# Altium PCB w32_dmx512-master_PCB.PcbDoc
Units mil, origin at the board's own origin, x right, y up, seen from the top; angles counter-clockwise.
Board outline 4660.03 x 1760.03 mil, 2 copper layers (Top Layer, Bottom Layer); 37 components, 31 nets, 143 pads, 16 vias.
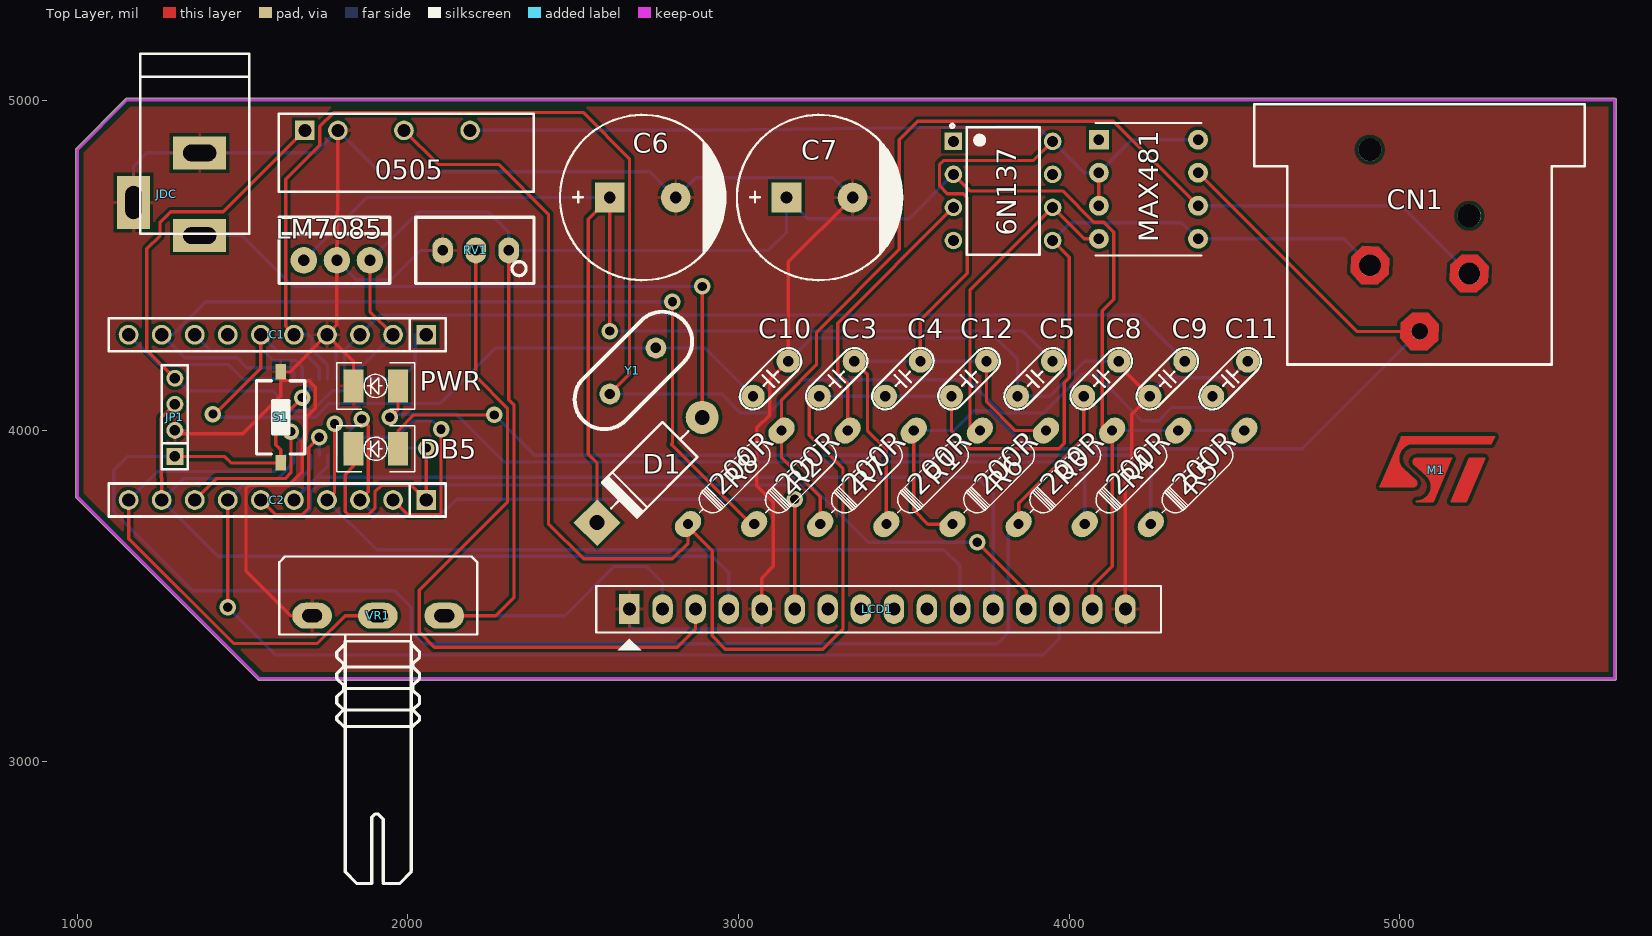
[diagram p0: Top Layer view]
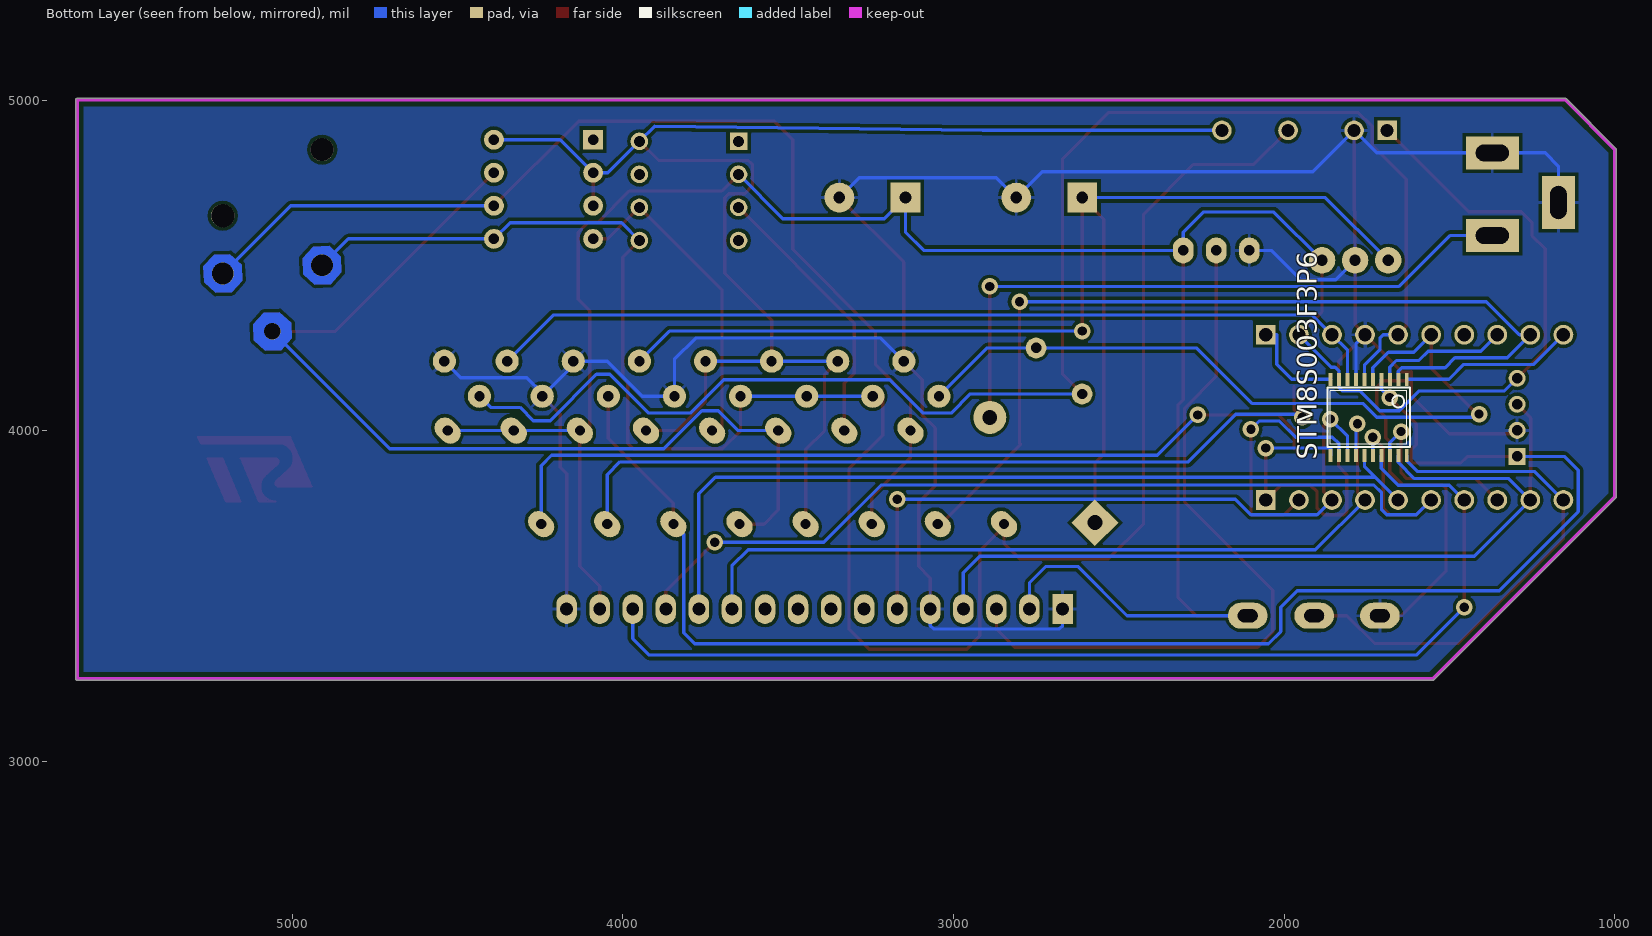
[diagram p1: Bottom Layer view, seen from below]
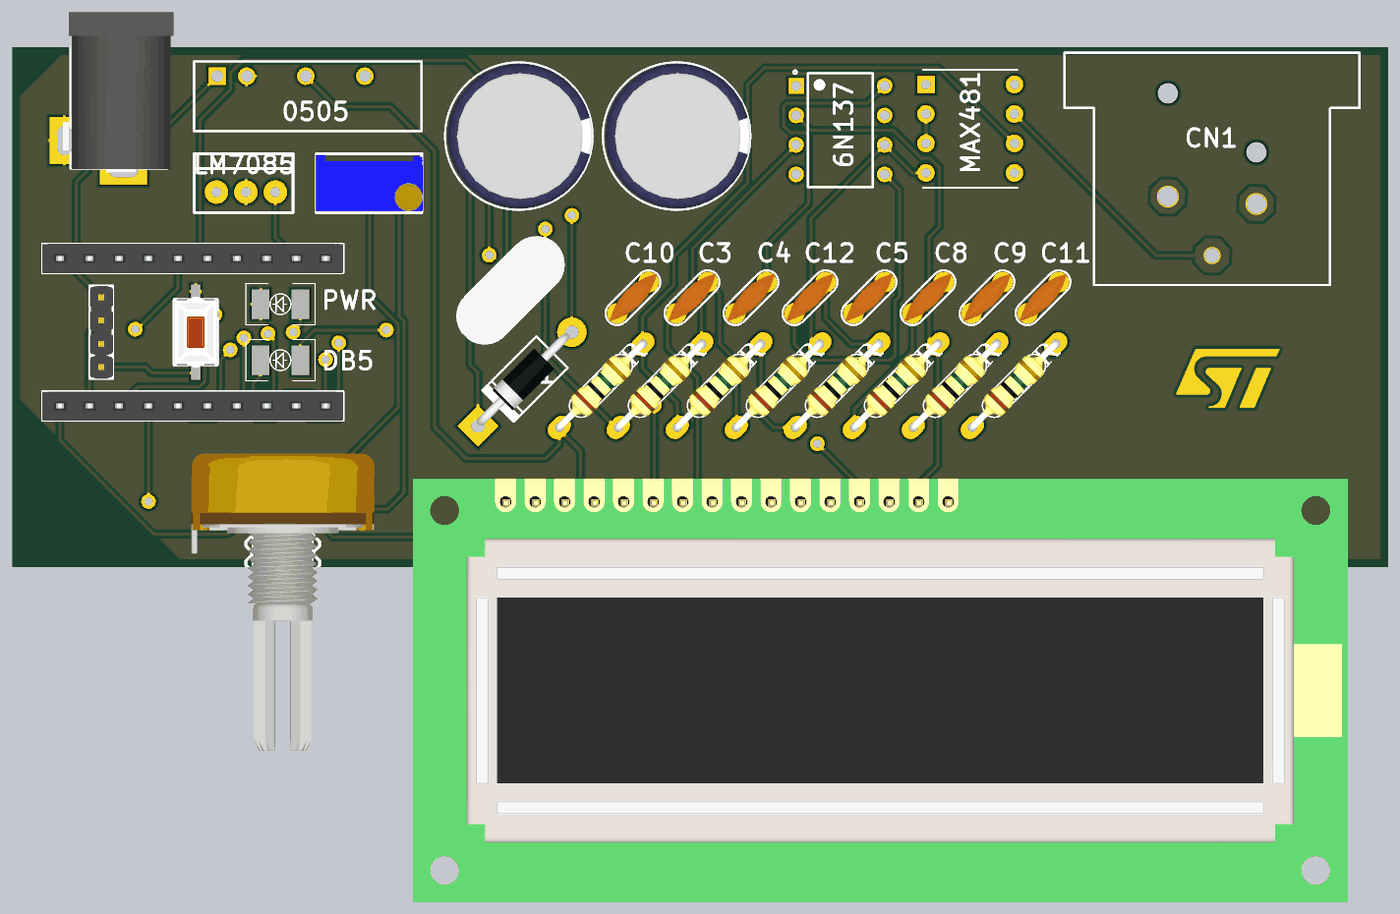
[diagram p2: 3D render of the assembled board from above, using the file's embedded part models]

## Layer stack, top to bottom
Top Solder: solder mask 0.4, Solder Resist, Dk 3.5
Top Layer: signal copper 1.4
Dielectric 1: dielectric 12.6, FR-4, Dk 4.8
Bottom Layer: signal copper 1.4
Bottom Solder: solder mask 0.4, Solder Resist, Dk 3.5

## Board outline
994.99,3800 994.99,4850 cw(c1000,4850) 996.47,4853.56 996.45,4853.55 1146.45,5003.55 1146.44,5003.53 cw(c1150,5000) 1150,5005.02 5650,5005.02 cw(c5650,5000) 5655.02,5000 5655.02,3250 cw(c5650,3250) 5650,3244.99 1550,3244.99 cw(c1550,3250) 1546.44,3246.47 1546.45,3246.45 996.45,3796.45 996.47,3796.44 cw(c1000,3800)

## Design rules (kind name [scope] priority, off if disabled: settings)
Clearance [All] p1: gap=10
PolygonConnect [All] p1: connectstyle=Relief reliefconductorwidth=10 reliefentries=4 polygonreliefangle="90 Angle" airgapwidth=10
RoutingVias [All] p1: holewidth=28 width=50 viastyle="Through Hole" minholewidth=28 minwidth=50 maxholewidth=28 maxwidth=50
SolderMaskExpansion [All] p1: expansion=4
Width [All] p1: maxlimit=10 minlimit=10 preferedwidth=10
30 further rules are at their usual default settings.

## Components (designator, comment, footprint, x,y, rotation, side; value= is the part's Value field where it differs from the comment)
6N137 "6N137" DIP762W50P254L977H451Q8 3800,4725 r0 top
0505 "REE-0505S" SIP600W25P254L1960H1020Q4P 1995,4840 r0 top (schematic designator U?)
C1 "JP10" JP10-C1T 2055,4290 r180 top
C2 "JP10" JP10-C1T 2055,3790 r180 top
C3 "104" CN150 3296.97,4156.97 r45 top
C4 "104" CN150 3496.97,4156.97 r45 top
C5 "104" CN150 3896.97,4156.97 r45 top
C6 "Cap Pol3" CP2/5 2610,4705 r0 top
C7 "Cap Pol3" CP2/5 3145,4705 r0 top
C8 "104" CN150 4096.97,4156.97 r45 top
C9 "104" CN150 4296.97,4156.97 r45 top
C10 "104" CN150 3096.97,4156.97 r45 top
C11 "104" CN150 4486.97,4156.97 r45 top
C12 "104" CN150 3696.97,4156.97 r45 top
CN1 "NC3FBH1" NC3FBH1 5060,4500 r0 top
D1 "1N4007" D2A 2571.8,3721.8 r45 top
DB5 "LED" LED-RED-0805 1970,3945 r180 top (schematic designator LED2)
JDC "Jac DC" DC-IN 1270,4715 r270 top
JP1 "JP4x1-2.0" J4-D1T 1295,4040 r90 top
LCD1 "LCD 16x2A" LCD16X2N 2670,3460 r0 top
LM7085 "LM7805" 7805 1785,4515 r0 top (schematic designator IC1)
M1 "STLOGO" STLOGO-SILVER 5110,3880 r0 top
MAX481 "MAX481CPA" 21-0043D_8 4390,4580 r0 top
PWR "LED" LED-RED-0805 1970,4135 r180 top (schematic designator LED1)
R1 "R0.4W" "DIEN TRO 1/4 W" 3447.16,3717.16 r45 top
R2 "R0.4W" "DIEN TRO 1/4 W" 3047.16,3717.16 r45 top
R3 "R0.4W" "DIEN TRO 1/4 W" 3847.16,3717.16 r45 top
R4 "R0.4W" "DIEN TRO 1/4 W" 4047.16,3717.16 r45 top
R5 "R0.4W" "DIEN TRO 1/4 W" 4247.16,3717.16 r45 top
R6 "R0.4W" "DIEN TRO 1/4 W" 3647.16,3717.16 r45 top
R7 "R0.4W" "DIEN TRO 1/4 W" 3247.16,3717.16 r45 top
R8 "R0.4W" "DIEN TRO 1/4 W" 2847.16,3717.16 r45 top
RV1 "RV20K" RVAR10K 2205,4545 r180 top
S1 "SW-SMD" SW-SMD 1615,4040 r90 top
STM8S003F3P6 "STM8S003F3P6" TSSOP20 1743.98,4040.13 r0 bottom
VR1 "10k" VR-S1 1910,3440 r0 top
Y1 "8MHz" XTAL 2681.86,4181.82 r45 top

## Footprints (in the part's own frame and the unit in brackets; to place one, negate y for a bottom-side part, rotate by r counter-clockwise, add the part's x,y. Pads: shape width x height; smd on the part's side, far side on the other; paste and mask are expansions set on the pad)
21-0043D_8 [mil]
  rect 60x60 hole 32: 1(-300,300)
  round 60 hole 32: 2(-300,200) 3(-300,100) 4(-300,0) 5(0,0) 6(0,100) 7(0,200) 8(0,300)
  silkscreen extent -310,-50 10,350
7805 [mil]
  round 80 hole 34: 1(-100,0) 2(0,0) 3(100,0)
  silkscreen extent -175,-70 160,130
CN150 [mil]
  round 70 hole 31: 1(-75,0) 2(75,0)
  silkscreen extent -115,-40 115,40, body extent -115,-33 115,33, height 235
CP2/5 [mil] "Tu hoa 1000uF/25V,50V"
  rect 90x90 hole 35: 1(0,0)
  round 90 hole 35: 2(200,0)
  silkscreen extent -150,-250 350,250, body extent -142,-246 350,246, height 984
D2A [mil] "Diode 2A, W 150mil, L 450mil"
  round 100 hole 45: 1(450,0)
  rect 100x100 hole 45: 2(0,0)
  silkscreen extent 61,-75 391,75, body extent 5,-47 435,54, height 100
DC-IN [mil] "Jac DC input"
  rect 100x160 hole 50 slot 100 at 90 deg: 1(125,100) 2(-125,100)
  rect 160x100 hole 50 slot 100 at 0 deg: 3(25,-100)
  silkscreen extent -425,-80 120,250, body extent -410,-105 134,269, height 434
"DIEN TRO 1/4 W" [mm]
  oval 2.2x1.6 hole 0.787: 1(0,0) 2(10.16,0)
  silkscreen extent 1.26,-1.02 8.88,1.02, body extent -0.3,-1.16 10.46,1.16, height 2.93
DIP762W50P254L977H451Q8 [mm]
  rect 1.35x1.35 hole 0.85: 1(-3.81,3.81)
  round 1.35 hole 0.85: 2(-3.81,1.27) 3(-3.81,-1.27) 4(-3.81,-3.81) 5(3.81,-3.81) 6(3.81,-1.27) 7(3.81,1.27) 8(3.81,3.81)
  silkscreen extent -4.04,-4.9 2.8,5.14
J4-D1T [mm] "4 pins, 1 row, straight, gold plating"
  rect 1.3x1.3 hole 0.8: 1(-3,0)
  round 1.3 hole 0.8: 2(-1,0) 3(1,0) 4(3,0)
  silkscreen extent -4,-1 4,1, body extent -4,-1 4,1, height 6.01
JP10-C1T [mm] "10 row, straight, gold plating"
  rect 1.52x1.52 hole 1.02: 1(0,0)
  round 1.52 hole 1.02: 2(2.54,0) 3(5.08,0) 4(7.62,0) 5(10.16,0) 6(12.7,0) 7(15.24,0) 8(17.78,0) 9(20.32,0) 10(22.86,0)
  silkscreen extent -1.52,-1.27 24.38,1.27, body extent -1.52,-1.25 24.38,1.25, height 8.51
LCD16X2N [mil] "LCD dipslay 16x2, 16 pin"
  rect 62x90 hole 39: 1(0,0)
  oval 62x90 hole 39: 2(100,0) 3(200,0) 4(300,0) 5(400,0) 6(500,0) 7(600,0) 8(700,0) 9(800,0) 10(900,0) 11(1000,0) 12(1100,0) 13(1200,0) 14(1300,0) 15(1400,0) 16(1500,0)
  silkscreen extent -100,-125 1608,70, body extent -320,-1353 2850,84, height 764
LED-RED-0805 [mil]
  rect 60x100 smd: 1(0,0) 2(135,0)
  silkscreen extent -50,-70 185,70, body extent -20,-60 154,60, height 75
NC3FBH1 [mil]
  round 66 hole 66: 1(-150,0) 2(150,-25)
  round 50 hole 50: 3(0,-200)
  round 70 hole 70 unplated: None(-150,350) None(150,150)
  Top Layer region: -91.27,21.38 -123.59,56.64 -171.38,58.73 -206.64,26.41 -208.73,-21.38 -176.41,-56.64 -128.62,-58.73 -93.36,-26.41
  Top Layer region: 58.73,-178.62 26.41,-143.36 -21.38,-141.27 -56.64,-173.59 -58.73,-221.38 -26.41,-256.64 21.38,-258.73 56.64,-226.41
  Top Layer region: 208.73,-3.62 176.41,31.64 128.62,33.73 93.36,1.41 91.27,-46.38 123.59,-81.64 171.38,-83.73 206.64,-51.41
  Bottom Layer region: -91.27,21.38 -123.59,56.64 -171.38,58.73 -206.64,26.41 -208.73,-21.38 -176.41,-56.64 -128.62,-58.73 -93.36,-26.41
  Bottom Layer region: 58.73,-178.62 26.41,-143.36 -21.38,-141.27 -56.64,-173.59 -58.73,-221.38 -26.41,-256.64 21.38,-258.73 56.64,-226.41
  Bottom Layer region: 208.73,-3.62 176.41,31.64 128.62,33.73 93.36,1.41 91.27,-46.38 123.59,-81.64 171.38,-83.73 206.64,-51.41
  Multi-Layer region: -91.27,21.38 -123.59,56.64 -171.38,58.73 -206.64,26.41 -208.73,-21.38 -176.41,-56.64 -128.62,-58.73 -93.36,-26.41
  Multi-Layer region: 58.73,-178.62 26.41,-143.36 -21.38,-141.27 -56.64,-173.59 -58.73,-221.38 -26.41,-256.64 21.38,-258.73 56.64,-226.41
  Multi-Layer region: 208.73,-3.62 176.41,31.64 128.62,33.73 93.36,1.41 91.27,-46.38 123.59,-81.64 171.38,-83.73 206.64,-51.41
  silkscreen extent -500,-300 500,488
RVAR10K [mm] "Bien tro vi chinh"
  oval 1.6x2 hole 0.8: 1(-2.54,0) 2(0,0) 3(2.54,0)
  silkscreen extent -4.47,-2.54 4.6,2.54, body extent -4.54,-2.4 4.66,2.4, height 12.02
SIP600W25P254L1960H1020Q4P [mm]
  rect 1.508x1.508 hole 1: 1(-7.8,1.73)
  round 1.508 hole 1: 2(-5.26,1.73) 4(-0.18,1.73) 6(4.9,1.73)
  silkscreen extent -9.8,-3 9.8,3
STLOGO-SILVER [mil]
  Top Layer lines w6: -149,-49 -169,-49 ; -34,-89 -9,-89 -9,-84 -29,-84 -24,-79 -4,-79 -4,-74 -19,-74 -14,-69 1,-69 1,-64 -14,-64 -9,-59 6,-59 6,-54 -9,-54 -9,-49 6,-49 ; 51,-94 106,36 86,-94 141,36 81,-94 ; 166,86 -109,86 -104,91 171,91 171,96 -104,96 -164,-49 -104,86 -159,-49 -99,86 -104,71 -94,86 -74,81 -94,81 -94,76 -99,71 -114,56 -119,31 -154,-49 -64,-44 -149,-44 ; -169,-49 -104,101 176,101 166,81 -69,81 ccw(c-69,36) -100.82,4.18 -62.31,-31.57 cw(c-69,-39) -69,-49 -169,-49 ; -149,-44 -119,26 -114,26 -119,21 -114,21 -124,16 -114,16 -124,11 -109,11 -129,6 -104,6 -129,1 -99,1 -134,-4 -94,-4 -134,-9 -89,-9 -139,-14 -84,-14 -139,-19 -79,-19 -139,-24 -74,-24 -144,-29 -69,-29 -144,-34 -64,-34 -144,-39 -64,-39 -149,-44 ; -59,16 -9,-29 -14,-39 -9,-64 16,-29 ; -59,16 -19,-19 ; -59,16 -64,21 36,21 41,26 -69,26 -64,31 41,31 -54,16 -19,-19 ; -59,16 36,16 31,11 -49,11 -49,6 31,6 31,1 -39,1 -39,-4 26,-4 26,-9 -29,-9 -29,-14 21,-14 21,-19 -19,-19 ; -19,-19 -19,-24 16,-24 16,-29 ; 6,-49 16,-29 ; 6,-49 6,-44 -9,-44 -9,-39 11,-39 11,-34 -14,-34 -14,-29 16,-29 ; 81,-94 131,36 76,-94 126,36 71,-94 121,36 66,-94 116,36 61,-94 111,36 56,-94 101,36 ; 81,-94 136,36 91,-94 ; 91,-94 146,36 101,36 ; 91,-94 46,-94 101,36 ; -65.69,18.57 cw(c-59,26) -59,36 46,36 -9,-94 -59,-94 ccw(c-59,-49) -27.18,-17.18 -65.69,18.57
SW-SMD [mm] "Switch SMD type"
  rect 1.2x0.8 smd: 1(-3.5,0) 2(3.5,0)
  silkscreen extent -2.82,-1.85 2.82,1.85, body extent -3.05,-1.85 3.05,1.85, height 2.5
TSSOP20 [mil]
  rect 12x39 smd: 1(-115.16,-114.87) 2(-89.57,-114.87) 3(-63.98,-114.87) 4(-38.39,-114.87) 5(-12.79,-114.87) 6(12.8,-114.87) 7(38.39,-114.87) 8(63.98,-114.87) 9(89.57,-114.87) 10(115.16,-114.87) 11(115.16,114.87) 12(89.57,114.87) 13(63.98,114.87) 14(38.39,114.87) 15(12.8,114.87) 16(-12.79,114.87) 17(-38.39,114.87) 18(-63.98,114.87) 19(-89.57,114.87) 20(-115.16,114.87)
  silkscreen extent -125,-90 125,90
VR-S1 [mil]
  oval 120x78.74 hole 40 slot 60 at 0 deg: 1(-200,0) 2(-1,0) 3(200,0)
  silkscreen extent -299,-810 300,179, body extent -310,-818 310,188, height 839
XTAL [mm]
  round 1.6 hole 0.8: 1(-2.552,0.001) 2(2.448,0.001)
  silkscreen extent -5.44,-2.29 5.44,2.29, body extent -5.55,-2.32 5.62,2.35, height 3.63

## Part data
6N137: "High CMR, High Speed TTL Compatible Optocouplers"
0505: "REE Series 4.5 - 5.5 V 1 W Single Output Through Hole DC/DC-Converter - SIP7"
C1 C2: "WR-PHD 2.54 mm Angled Socket Header"
C3 C4 C5 C8 C9 C10 C11 C12: library part CN1.5, "Capacitor Ceramic"
C6 C7: "Polarized Capacitor (Surface Mount)"
CN1: "XLR Receptacle; Female; Gold; Horizontal PCB Mount; 0.996 in.; Ground"
D1: library part D1A, "Diode 1A"
DB5 PWR: library part "LED SMD"
JDC: library part DCIN, "Jac DC input"
JP1: "WR-PHD 2.00 mm Socket Header"
LCD1: library part LCD16x2A, "LCD dipslay 16 char, 2 line"
MAX481: "Single Transmitter/Receiver RS-422/RS-485 8-Pin PDIP N"
R1 R2 R3 R4 R5 R6 R7 R8: library part "Res 1/4 W", "Resistor"
RV1: library part "Variable Resistor", "Variable Resistor"
S1: "Switch"
STM8S003F3P6: "Mainstream Value line 8-bit MCU with 8 Kbytes Flash, 16 MHz CPU, integrated EEPROM"
VR1: library part VR-S, "Var Resistor"
Y1: library part XTAL, "Crystal Oscillator"

## Via types
v1: diameter 50, hole 28, Top Layer to Bottom Layer, 16 vias

## Nets (pads, with @x,y where several pads share a name; then routed paths per layer and width w, separated by ;. In a path a pad name is that pad's centre, name@x,y a point inside that pad or via, vN(x,y) a via of type N, cw(c..) or ccw(c..) an arc to the next point about the centre after c; other vN are vias at no path point)
+5V: 6N137.2 0505.1 C1.2 C7.1 JP1.4 LCD1.2 LCD1.15 LM7085.3 R3.2 R4.2 R5.2 RV1.1 STM8S003F3P6.9 VR1.3 | length 8553.6
  Top Layer w10: JP1.4 1210,4243.11 1210,4550 1250,4590 1250,4630 1282,4662 1441.8,4662 0505.1 ; LM7085.3 1885,4360 C1.2 ; VR1.3 2265,3440 2320.8,3495.8 2320.8,4077.2 2305,4093 RV1.1 ; 6N137.2 3700,4725 3980,4725 4075,4630 4105,4630 4135,4600 4135,4397 4100,4362 4100,3995.82 R3.2@4130,3995.82 ; LCD1.15 4070,3529 4130,3589 R3.2@4130,3995.82 ; R3.2 R3.2@4130,3995.82
  Bottom Layer w10: JP1.4 1333.11,4120 1591,4120 1651,4060 1711,4060 1771.43,4120.43 1823.97,4120.43 1833.54,4130 STM8S003F3P6.9 1833.54,4180 1845.54,4192 1857,4192 C1.2 ; LM7085.3 2031,4661 2244,4661 2305,4600 RV1.1 3090,4545 3145,4600 C7.1 3209,4641 3516,4641 6N137.2 ; VR1.3 2475,3440 2624,3589 2720,3589 2770,3539 LCD1.2 ; R3.2 R4.2 R5.2
ADC_IN4: C2.10 STM8S003F3P6.20 VR1.2 | length 1576.1
  Top Layer w10: C2.10 1155,3673.29 1472.29,3356 1726,3356 1810,3440 VR1.2
  Bottom Layer w10: C2.10 1241,3876 1595.42,3876 1628.82,3909.4 STM8S003F3P6.20
GISOL: 6N137.5 0505.4 C3.1 C4.1 C12.1 CN1.1 MAX481.5 R8.1 | length 6146.9
  Top Layer w10: 0505.4 2091.02,4805 2274,4805 2425,4654 2425,3718 2531,3612 2800,3612 2847.16,3659.16 R8.1@2847.16,3708.81 ; R8.1 R8.1@2847.16,3708.81 ; C3.1 3214,4103.93 3214,3986 3316,3884 3316,3400 3255,3339 2960,3339 2920,3379 2920,3635.96 R8.1@2847.16,3708.81 ; C12.1 3643.93,4000 3698.93,3945 3968.85,3945 3984.85,3961 3984.85,4144.85 4000,4160 4000,4525 6N137.5
  Bottom Layer w10: C3.1 C4.1 C12.1 ; 6N137.5 4004,4629 4341,4629 MAX481.5 4830,4580 CN1.1
GND: 0505.2 C1.4 C5.1 C6.2 C7.2 C8.2 C9.1 C10.2 C11.2 JDC.2 JDC.3 JP1.2 LCD1.1 LCD1.5 LCD1.16 LM7085.2 PWR.2 RV1.3 S1.2 STM8S003F3P6.7 VR1.1 | length 9946.9
  Top Layer w10: JP1.2 1305.63,3990 1500,3990 1615,4105 1615,4151 ; S1.2 S1.2@1615,4177 ; VR1.1 1646,3440 1510,3576 1510,3824.92 1520,3834.92 1640,3834.92 1680,3874.92 1680,3966 1692,3978 1692,4040 1720,4068 1720,4131 1700,4151 1615,4151 ; 0505.2 1787.91,4713.91 LM7085.2 1785,4320 C1.4 ; PWR.2 1835,4210 C1.4 ; LCD1.5 3070,3554 3105,3589 3105,3783 3055,3833 3055,4008 3094,4047 3094,4154 C10.2 3150,4510 C7.2 ; C8.2 4150,4197.87 C9.1 4189,4049 4189,3889 4170,3870 LCD1.16 ; 1615,4151 S1.2@1615,4177 ; S1.2@1615,4177 1642,4177 C1.4
  Bottom Layer w10: JDC.3 1170,4800 1210,4840 JDC.2 1719.8,4840 0505.2 1913.02,4783 2732,4783 C6.2 2870,4765 3285,4765 C7.2 ; C1.4 1782.36,4262.64 STM8S003F3P6.7 ; LM7085.2 1844,4456 1950,4456 2039,4545 RV1.3 ; LCD1.1 2670,3410 2680,3400 3060,3400 3070,3410 LCD1.5 ; C10.2 3220,4280 3780,4280 3843.93,4216.07 C5.1 3940.87,4103.93 4046.93,4210 4137.87,4210 C9.1 4243.93,4113.93 4290,4160 4490,4160 C11.2
LCD_DB4: C2.4 LCD1.11 STM8S003F3P6.14 | length 2465.4
  Top Layer w10: C2.4 1778,3813 v1(1778,4020.43)
  Bottom Layer w10: C2.4 1905,3640 3621,3640 3670,3591 LCD1.11 ; v1(1778,4020.43) 1782.36,4016.06 STM8S003F3P6.14
LCD_DB5: C2.5 LCD1.12 STM8S003F3P6.15 | length 2593.1
  Bottom Layer w10: C2.5 1724,3859 ; STM8S003F3P6.15 1756.77,3891.77 1724,3859 ; LCD1.12 3770,3809 3720,3859 1724,3859
LCD_DB6: C2.6 LCD1.13 STM8S003F3P6.16 | length 3043.8
  Top Layer w10: C2.6 1600,3745 1680,3745 1700,3765 1700,3948 v1(1732,3980) ; v1(3722,3662) 3870,3514 LCD1.13
  Bottom Layer w10: C2.6 1600,3745 1690,3745 1705,3760 1705,3811.71 1728.71,3835.43 3218.57,3835.43 3392,3662 v1(3722,3662) ; STM8S003F3P6.16 1731.18,3979.18 v1(1732,3980)
LCD_DB7: C2.7 LCD1.14 STM8S003F3P6.17 | length 3338.4
  Top Layer w10: v1(1455,3466) C2.7
  Bottom Layer w10: v1(1455,3466) 1600,3321 3920,3321 3970,3371 LCD1.14 ; C2.7 1499.92,3834.92 1654.51,3834.92 1705.59,3886 STM8S003F3P6.17
LCD_EN: C2.3 LCD1.6 STM8S003F3P6.13 | length 2080.1
  Top Layer w10: C2.3 1880,3815 1880,4015 v1(1860,4035) ; LCD1.6 v1(3170,3792)
  Bottom Layer w10: STM8S003F3P6.13 1807.95,3982.95 v1(1860,4035) ; C2.3 1900,3745 2100,3745 2147,3792 v1(3170,3792)
LCD_RS: C2.9 JP1.3 LCD1.4 STM8S003F3P6.19 | length 2690.8
  Top Layer w10: C2.9 1255,3857 1254,3858 1254,4038.37 JP1.3
  Bottom Layer w10: STM8S003F3P6.19 1654.41,3903.91 1605.42,3854.92 1319.92,3854.92 C2.9 1425,3620 2920,3620 2970,3570 LCD1.4
Net6N137_3: 6N137.3 R2.2 | length 832.4
  Top Layer w10: R2.2 3330,4143 3300,4173 3300,4325 6N137.3
Net6N137_6: 6N137.6 MAX481.4 R1.2 | length 999.7
  Top Layer w10: R1.2 3721.65,3991.65 3700,3991.65 3700,4425 6N137.6 4045,4580 MAX481.4
NetC5_2: C5.2 C6.1 D1.2 LM7085.1 | length 3806.6
  Top Layer w10: D1.2 2571.8,3902 2545,3928.8 2545,4640 C6.1 v1(2610,4301)
  Bottom Layer w10: LM7085.1 1875,4705 C6.1 ; v1(2610,4301) 3859,4301 C5.2
NetCN1_2: CN1.2 MAX481.6 R7.1 R8.2 | length 3297
  Top Layer w10: R7.1 3247.16,3800 3130,3917.16 R8.2 3130,4094 3236,4200 3236,4298 3486,4548 3486,4880 3542,4936 4134,4936 MAX481.6
  Bottom Layer w10: MAX481.6 5005,4680 CN1.2
NetCN1_3: CN1.3 MAX481.7 R6.1 R7.2 | length 2993.1
  Top Layer w10: R7.2 3530,3760 3572.84,3717.16 R6.1 ; MAX481.7 4870,4300 CN1.3
  Bottom Layer w10: R7.2 3651,4000 3711,4060 3760.71,4060 3875.56,3945.15 4705.15,3945.15 CN1.3
NetD1_1: D1.1 JDC.1 | length 1979.8
  Top Layer w10: D1.1 v1(2890,4436)
  Bottom Layer w10: JDC.1 1498,4590 1652,4436 v1(2890,4436)
NetLCD1_3: LCD1.3 RV1.2 | length 2242
  Top Layer w10: RV1.2 2205,4164 2300.8,4068.2 2300.8,3783.8 2034,3517 2034,3391 2080,3345 2815,3345 2870,3400 LCD1.3
NetLED1_1: PWR.1 R4.1 | length 2436.4
  Top Layer w10: v1(1945,4040) 1970,4065 PWR.1
  Bottom Layer w10: v1(1945,4040) 1954,4049 2146.12,4049 2289.97,3905.15 4008.85,3905.15 4047.16,3866.84 R4.1
NetLED2_1: DB5.1 R5.1 | length 2592
  Top Layer w10: DB5.1 1970,4000 2017.33,4047.33 v1(2260.8,4047.33)
  Bottom Layer w10: v1(2260.8,4047.33) 2382.97,3925.15 4215.85,3925.15 4247.16,3893.84 R5.1
NRST: C8.1 JP1.1 R3.1 S1.1 STM8S003F3P6.4 | length 4697.3
  Top Layer w10: JP1.1 1445,3921.89 1464.69,3902.2 S1.1 1615,3942 1600,3957 1600,4020 v1(1680,4100) ; R3.1 3847.16,3780 4043.93,3976.78 C8.1
  Bottom Layer w10: JP1.1 1151.89,3921.89 1110,3880 1110,3755 1349,3516 1960,3516 2010,3466 2010,3392 2047,3355 3783,3355 3816,3388 3816,3686 R3.1 ; v1(1680,4100) 1705.59,4125.59 STM8S003F3P6.4
OSCIN: C1.6 C10.1 STM8S003F3P6.5 Y1.2 | length 2350.2
  Top Layer w10: v1(1410,4050) 1410,4044 1555,4189 C1.6
  Bottom Layer w10: v1(1410,4050) 1420,4040 1719.29,4040 1761.29,4082 2097,4082 2265,4250 Y1.2 2897.87,4250 C10.1 ; C1.6 1608,4237 1684.18,4237 1731.18,4190 STM8S003F3P6.5
OSCOUT: C1.5 C11.1 STM8S003F3P6.6 Y1.1 | length 4703
  Top Layer w10: C1.5 1630,4315 1630,4760 1733,4863 1733,4920 1775,4962 2531,4962 2670,4823 2670,4170 Y1.1
  Bottom Layer w10: C1.5 1700,4290 1710,4280 1710,4245 1756.77,4198.23 STM8S003F3P6.6 ; Y1.1 2949.19,4110.81 3007,4053 3092,4053 3193,4154 3695,4154 3796,4053 3922.29,4053 4039.29,4170 4080,4170 4220,4030 4271,4030 4311,4070 4400,4070 C11.1
PA3: C1.1 STM8S003F3P6.10 | length 304.5
  Bottom Layer w10: STM8S003F3P6.10 1977,4155 2022,4200 2022,4290 C1.1
PB4: C2.2 STM8S003F3P6.12 | length 762.8
  Top Layer w10: C2.2 2000,3745 2100,3745 v1(2100,4004)
  Bottom Layer w10: STM8S003F3P6.12 1833.54,3960 1853.54,3980 1965,3980 2014,4029 2075,4029 v1(2100,4004)
PB5: C2.1 DB5.2 STM8S003F3P6.11 | length 909.9
  Top Layer w10: DB5.2 1835,3892 1810,3867 1810,3755 1820,3745 1880,3745 1900,3765 1900,3815 1920,3835 2010,3835 C2.1 v1(2055,3947.27)
  Bottom Layer w10: STM8S003F3P6.11 1859.13,3947.27 v1(2055,3947.27)
PD1: C2.8 STM8S003F3P6.18 | length 535.8
  Top Layer w10: C2.8 1419.92,3854.92 1628.92,3854.92 1646,3872 v1(1646,3997)
  Bottom Layer w10: v1(1646,3997) 1680,3963 STM8S003F3P6.18
PD4: C1.10 STM8S003F3P6.1 | length 529.7
  Bottom Layer w10: C1.10 1245,4200 1456,4200 1501,4155 STM8S003F3P6.1
PD5: C1.9 R2.1 STM8S003F3P6.2 | length 2858.9
  Top Layer w10: v1(2800,4390) 2800,3961.96 2797,3958.96 3038.81,3717.16 R2.1
  Bottom Layer w10: STM8S003F3P6.2 1654.41,4180 1644.41,4190 1513,4190 1483,4220 1325,4220 C1.9 1288,4290 1388,4390 2785.92,4390 2800,4375.92 v1(2800,4390)
PD6: C1.8 STM8S003F3P6.3 | length 402.6
  Bottom Layer w10: C1.8 1405,4240 1564,4240 1592,4212 1660,4212 1680,4192 STM8S003F3P6.3
VCAP: C1.3 C9.2 STM8S003F3P6.8 | length 2731.9
  Bottom Layer w10: STM8S003F3P6.8 1807.95,4242.95 C1.3 1914.46,4349.46 4210.54,4349.46 C9.2
VISOL: 6N137.8 0505.6 C3.2 C4.2 C12.2 MAX481.2 MAX481.3 MAX481.8 R1.1 R6.2 | length 4762.2
  Top Layer w10: C3.2 3390,4170 3390,4000 3447.16,3942.84 R1.1 ; C4.2 3550,4334 3692,4476 3692,4704.58 3680,4716.58 3631.42,4716.58 3608,4740 3608,4805 3620,4817 3892,4817 6N137.8 ; C12.2 3750,4087 3837,4000 R6.2 ; MAX481.3 MAX481.2
  Bottom Layer w10: 0505.6 2912.11,4908.11 3904,4921 6N137.8 4045,4780 MAX481.2 4190,4880 MAX481.8 ; C3.2 C4.2 C12.2
pads on no net: 6N137.1 6N137.4 6N137.7 C1.7 CN1.None LCD1.7 LCD1.8 LCD1.9 LCD1.10 MAX481.1

## Polygon pours and split planes (outlines as drawn)
GND on Top Layer "GND_L01_P014" (solid, pour order 14): 5630,4980 5630,3270 1560,3270 1020,3810 1020,4840 1160,4980
GND on Bottom Layer "GND_L02_P016" (solid, pour order 16): 1020,4840 1160,4980 5630,4980 5630,3270 1560,3270 1020,3810

## Keep-outs
Keep-Out Layer:
  lines w10: 1000,3800 1550,3250 5650,3250 5650,5000 1150,5000 1000,4850 1000,3800

## Text inside footprints (layer, text, board x,y; h text height)
CN1: Mechanical 1 "1" at 4809.87,4515.17 h73.82; Mechanical 1 "3" at 4959.79,4314.79 h73.82; Mechanical 1 "2" at 5110.14,4490.16 h73.82
R1: Top Overlay "200R" at 3563.83,3784.33 h110.24 r45
R2: Top Overlay "200R" at 3163.83,3784.33 h110.24 r45
R3: Top Overlay "200R" at 3963.83,3784.33 h110.24 r45
R4: Top Overlay "200R" at 4163.83,3784.33 h110.24 r45
R5: Top Overlay "200R" at 4363.83,3784.33 h110.24 r45
R6: Top Overlay "200R" at 3763.83,3784.33 h110.24 r45
R7: Top Overlay "200R" at 3363.83,3784.33 h110.24 r45
R8: Top Overlay "200R" at 2963.83,3784.33 h110.24 r45